# Altium PCB fan.PcbDoc
Units mil, origin at the board's own origin, x right, y up, seen from the top; angles counter-clockwise.
Board outline 6000 x 4000 mil, 2 copper layers (Top Layer, Bottom Layer); 27 components, 39 nets, 117 pads, 0 vias.
Unrouted connection lines stored in the file: 8.
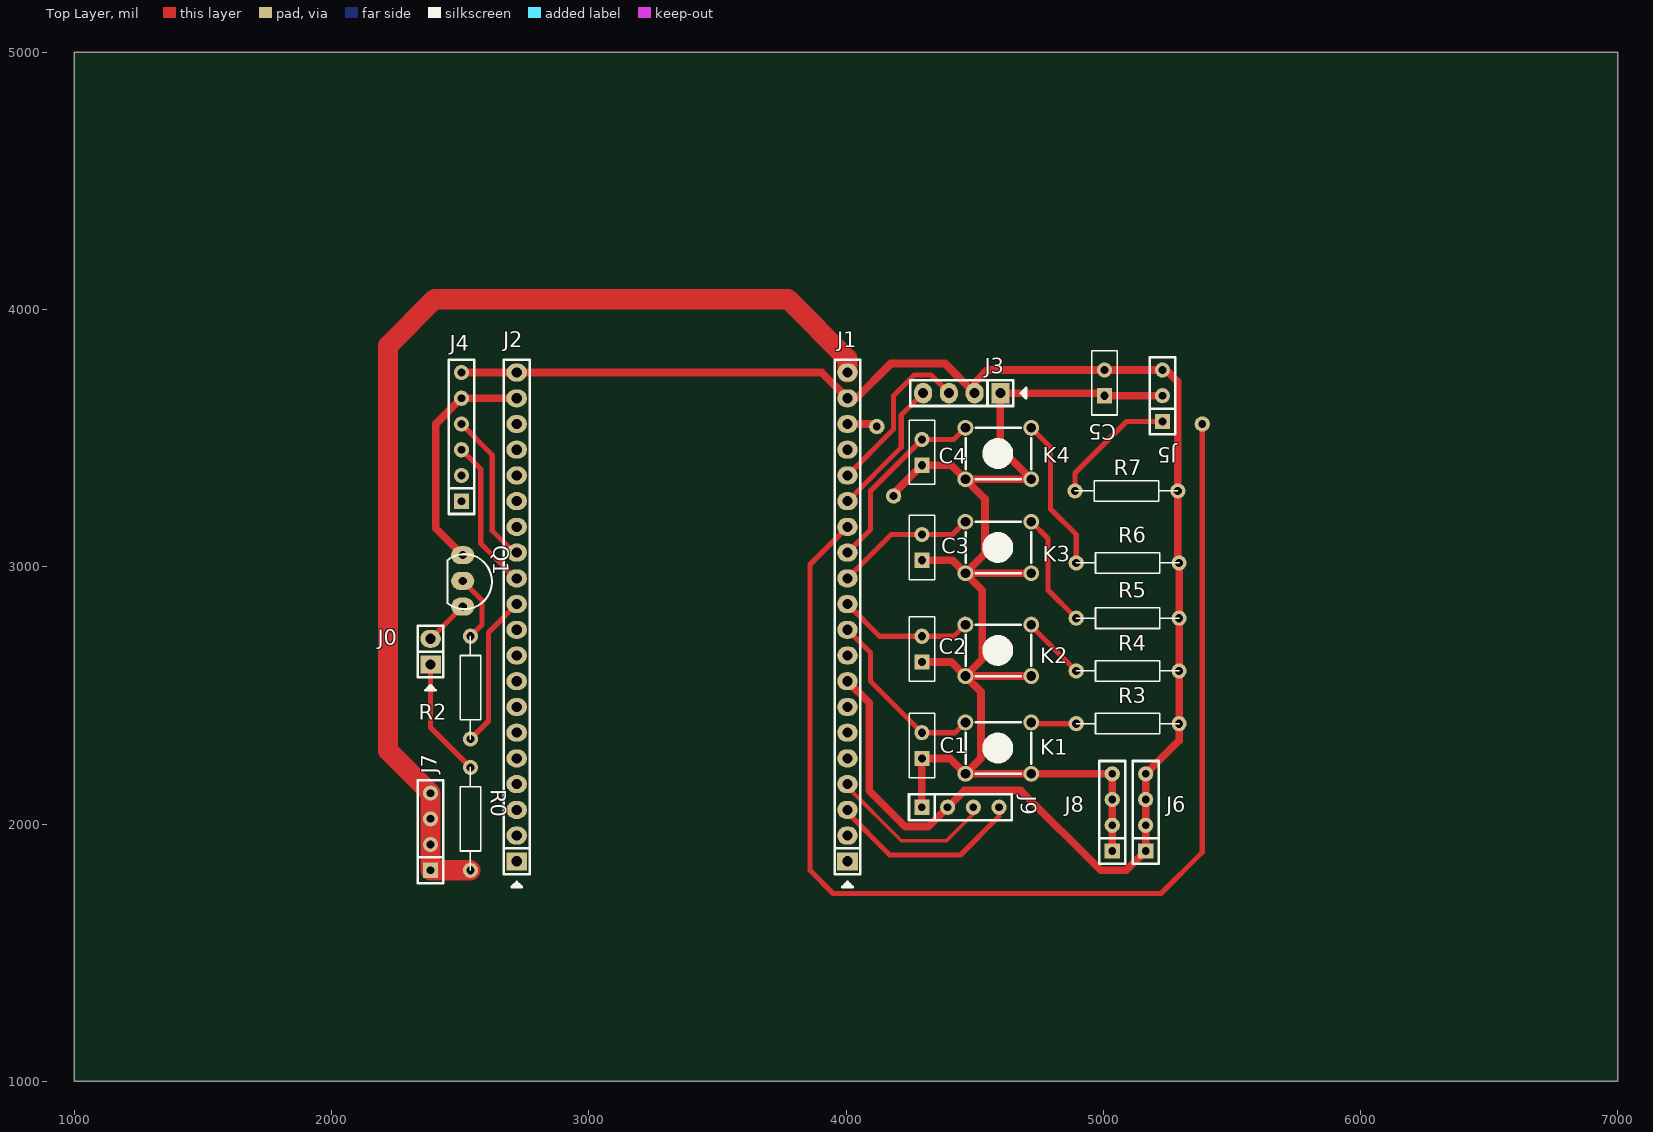
[diagram p0: Top Layer view]
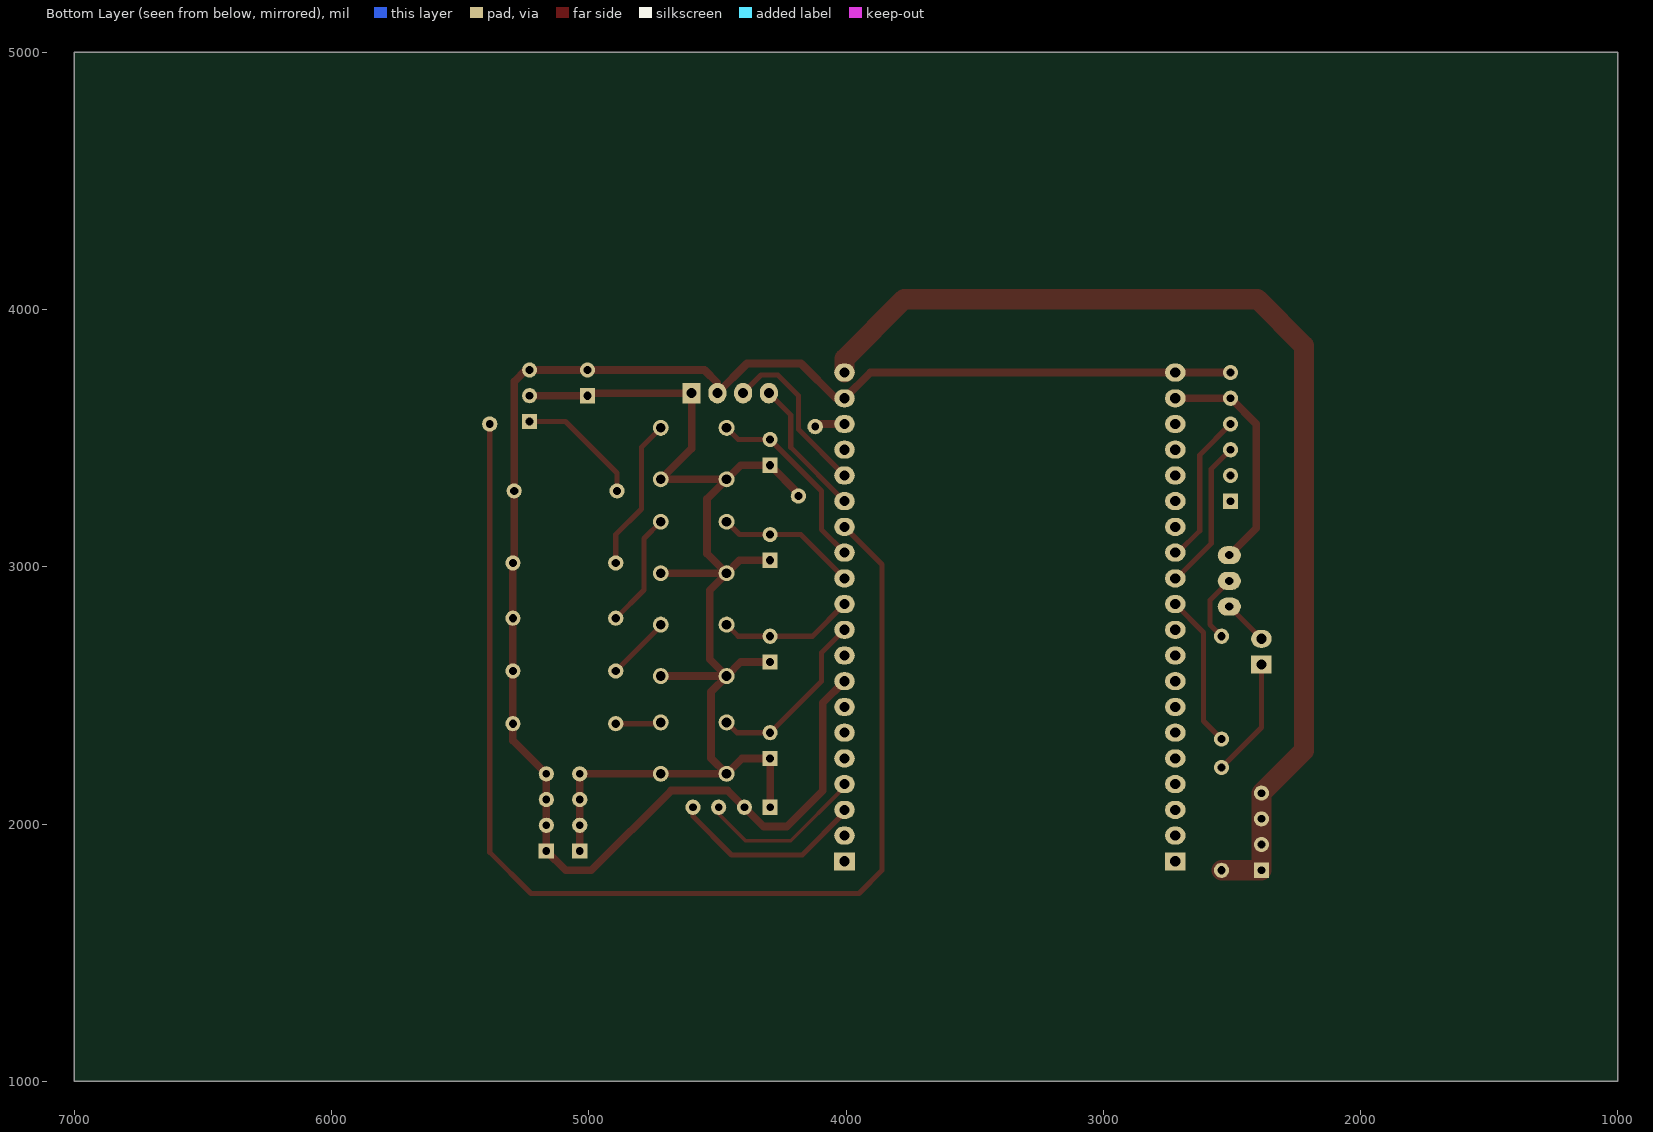
[diagram p1: Bottom Layer view, seen from below]

## Layer stack, top to bottom
Top Layer: signal copper 1.4
Dielectric: dielectric 12.6, FR-4, Dk 4.8
Bottom Layer: signal copper 1.4

## Board outline
1000,1000 7000,1000 7000,5000 1000,5000

## Design rules (kind name [scope] priority, off if disabled: settings)
Clearance [All] p1: gap=10
PolygonConnect [All] p1: connectstyle=Relief reliefconductorwidth=10 reliefentries=4 polygonreliefangle="90 Angle" airgapwidth=10
RoutingVias [All] p1: holewidth=28 width=50 viastyle="Through Hole" minholewidth=28 minwidth=50 maxholewidth=28 maxwidth=50
SolderMaskExpansion [All] p1: expansion=4
Width [All] p1: maxlimit=78.74 minlimit=10 preferedwidth=15
28 further rules are at their usual default settings.

## Components (designator, comment, footprint, x,y, rotation, side; value= is the part's Value field where it differs from the comment)
C1 "104" C-RAD254 4295,2255 r90 top
C2 "104" C-RAD254 4295,2630 r90 top
C3 "104" C-RAD254 4295,3025 r90 top
C4 "104" C-RAD254 4295,3395 r90 top
C5 "104" C-RAD254 5005,3665 r90 top
J0 "fan" PIN-2-2.54-1.0 2385,2670 r90 top
J1 "left" PIN-20-2.54-1.0 4005.71,2805 r90 top
J2 "right" PIN-20-2.54-1.0 2720,2805 r90 top
J3 "OLED" PIN-4-2.54-1.0 4450,3675 r180 top
J4 "ESP8266" SIP6 2505,3255 r90 top
J5 "REMOTE" SIP3 5230,3565 r90 top
J6 "HEADER4" SIP4 5165,1895 r90 top
J7 "V5" SIP4 2385,1820 r90 top
J8 "HEADER4" SIP4 5035,1895 r90 top
J9 "HEADER4" SIP4 4295,2065 r0 top
K1 "KEY-2P" KEY_M 4720,2195 r180 top
K2 "KEY-2P" KEY_M 4720,2575 r180 top
K3 "KEY-2P" KEY_M 4720,2975 r180 top
K4 "KEY-2P" KEY_M 4720,3340 r180 top
Q1 "SS8050" TO-92 2510,3045 r0 top
R0 "10R" R-AXIAL-0.4 2540,1820 r90 top
R2 "1K" R-AXIAL-0.4 2540,2730 r270 top
R3 "5K" R-AXIAL-0.4 5295,2390 r180 top
R4 "5K" R-AXIAL-0.4 5295,2595 r180 top
R5 "5K" R-AXIAL-0.4 5295,2800 r180 top
R6 "5K" R-AXIAL-0.4 5295,3015 r180 top
R7 "4.7K" R-AXIAL-0.4 4890,3295 r0 top

## Footprints (in the part's own frame and the unit in brackets; to place one, negate y for a bottom-side part, rotate by r counter-clockwise, add the part's x,y. Pads: shape width x height; smd on the part's side, far side on the other; paste and mask are expansions set on the pad)
C-RAD254 [mm]
  rect 1.5x1.5 hole 0.813: 1(0,0)
  round 1.5 hole 0.813: 2(2.54,0)
  silkscreen extent -1.91,-1.27 4.44,1.27
KEY_M [mil]
  round 62 hole 38: 1(0,0) 1(255.91,0) 2(0,-200) 2(255.91,-200)
  silkscreen extent 0,-200 255,0
PIN-2-2.54-1.0 [mil] "Pin Header"
  rect 70x80 hole 39.37: 1(-50,0)
  oval 70x80 hole 39.37: 2(50,0)
  silkscreen extent -150,-50 100,50, body extent -100,-50 100,50, height 398
PIN-4-2.54-1.0 [mil] "Pin Header"
  rect 70x80 hole 39.37: 1(-150,0)
  oval 70x80 hole 39.37: 2(-50,0) 3(50,0) 4(150,0)
  silkscreen extent -250,-50 200,50, body extent -200,-50 200,50, height 398
PIN-20-2.54-1.0 [mil] "Pin Header"
  rect 70x80 hole 39.37: 1(-950,0)
  oval 70x80 hole 39.37: 2(-850,0) 3(-750,0) 4(-650,0) 5(-550,0) 6(-450,0) 7(-350,0) 8(-250,0) 9(-150,0) 10(-50,0) 11(50,0) 12(150,0) 13(250,0) 14(350,0) 15(450,0) 16(550,0) 17(650,0) 18(750,0) 19(850,0) 20(950,0)
  silkscreen extent -1050,-50 1000,50, body extent -1000,-50 1000,50, height 398
R-AXIAL-0.4 [mm]
  round 1.5 hole 0.813: 1(0,0) 2(10.16,0)
  silkscreen extent 0,-1.02 10.16,1.02
SIP3 [mm]
  rect 1.5x1.5 hole 0.762: 1(0,0)
  round 1.5 hole 0.762: 2(2.54,0) 3(5.08,0)
  silkscreen extent -1.27,-1.27 6.35,1.27
SIP4 [mm]
  rect 1.5x1.5 hole 0.762: 1(0,0)
  round 1.5 hole 0.762: 2(2.54,0) 3(5.08,0) 4(7.62,0)
  silkscreen extent -1.27,-1.27 8.89,1.27
SIP6 [mm]
  rect 1.5x1.5 hole 0.762: 1(0,0)
  round 1.5 hole 0.762: 2(2.54,0) 3(5.08,0) 4(7.62,0) 5(10.16,0) 6(12.7,0)
  silkscreen extent -1.27,-1.27 13.97,1.27
TO-92 [mil]
  oval 90x70 hole 31.5: 1(0,-100) 2(0,0) 3(0,-200)
  silkscreen extent -60,-209 114,4

## Part data
C1 C2 C3 C4 C5: library part CAP
J0: library part HDR1x2, "Connector"
J1 J2: library part HDR1x20, "Connector"
J3: library part HDR1x4, "Connector"
J4: library part HEADER6
J5: library part HEADER3
J7: library part HEADER4
K1 K2 K3 K4: "Key"
Q1: library part 8050-SMD, "高频放大-NPN型"
R0 R2 R3 R4 R5 R6 R7: library part RES

## Free pads (board coordinates)
  round 60 hole 30: 0(4185,3275) 1(4120,3545) 2(5385,3555)

## Nets (pads, with @x,y where several pads share a name; then routed paths per layer and width w, separated by ;. In a path a pad name is that pad's centre, name@x,y a point inside that pad or via, vN(x,y) a via of type N, cw(c..) or ccw(c..) an arc to the next point about the centre after c; other vN are vias at no path point)
BTN: J2.16
CLK: J2.6
CSN: J2.9
EXTON: J1.5
GND: C1.1 C2.1 C3.1 C4.1 C5.1 J1.18 J2.18 J2.19 J3.1 J4.5 J5.2 J8.1 J8.2 J8.3 J8.4 J9.1 K1.1 K2.1 K3.1 K4.1 pad.0 pad.1 Q1.2 | length 6121.8
  Top Layer w30: Q1.2 2405,3150 2405,3555 J4.5 J2.19 ; J1.18 4110,3555 pad.1 ; pad.0 4185,3285 C4.1 4409.09,3395 K4.1@4464.09,3340 ; J9.1 C1.1 4404.09,2255 K1.1@4464.09,2195 ; C2.1 4409.09,2630 K2.1@4464.09,2575 ; C3.1 4414.09,3025 K3.1@4464.09,2975 ; K2.1@4720,2575 K2.1@4464.09,2575 ; K3.1@4720,2975 K3.1@4464.09,2975 ; J8.1 J8.2 J8.3 J8.4 4720,2195 K1.1@4464.09,2195 ; J5.2 C5.1 4995,3675 J3.1 4600,3460 4720,3340 K4.1@4464.09,3340 ; K1.1@4464.09,2195 4525,2255.91 4525,2514.09 K2.1@4464.09,2575 ; K2.1@4464.09,2575 4530,2640.91 4530,2909.09 K3.1@4464.09,2975 ; K3.1@4464.09,2975 4540,3050.91 4540,3264.09 K4.1@4464.09,3340
IO4: J2.4
IO5: J2.3
IO6: J2.2
IO7: J2.1
IRQ: J2.5
LED1: J2.14
LED2: J2.15
MISO: J2.7
MOSI: J2.8
NetJ0_1: J0.1 R0.2 | length 464.2
  Top Layer w20: J0.1 2385,2375 R0.2
NetJ0_2: J0.2 Q1.3 | length 176.8
  Top Layer w20: J0.2 Q1.3
NetQ1_1: Q1.1 R2.1 | length 264.7
  Top Layer w20: Q1.1 2585,2870 2585,2775 R2.1
PA3: J2.10
PA8: J1.2
PA15: J1.9
"PB1 TIM3-3": J2.11 R2.2 | length 599.6
  Top Layer w20: R2.2 2610,2400 2610,2745 J2.11
"PB3 PLAY": C1.2 J1.10 K1.2 R3.2 | length 882.6
  Top Layer w20: J1.10 4095,2665.71 4095,2555 C1.2 4424.09,2355 K1.2@4464.09,2395 ; K1.2@4720,2395 4725,2390 R3.2
"PB4 SET": C2.2 J1.11 K2.2 R4.2 | length 781.3
  Top Layer w20: J1.11 4130.71,2730 C2.2 4419.09,2730 K2.2@4464.09,2775 ; K2.2@4720,2775 4720,2770 R4.2
"PB5 VOL-": C3.2 J1.12 K3.2 R5.2 | length 997
  Top Layer w20: J1.12 4175.71,3125 C3.2 4414.09,3125 K3.2@4464.09,3175 ; K3.2@4720,3175 4785,3110 4785,2910 R5.2
"PB8 REMOTE IN": J1.14 J5.1 pad.2 R7.1 | length 5171.8
  Top Layer w20: J1.14 3860,3009.29 3860,1820 3950,1730 5225,1730 5385,1890 pad.2@5385,3545 ; R7.1 4890,3365 5090,3565 J5.1
"PB9 VOL+": C4.2 J1.13 K4.2 R6.2 | length 1345
  Top Layer w20: J1.13 4095,3144.29 4095,3295 C4.2 4419.09,3495 K4.2@4464.09,3540 ; K4.2@4720,3540 4795,3465 4795,3225 4895,3125 R6.2
"PB10 USART3 TX": J2.12 J4.3 | length 592
  Top Layer w20: J4.3 2580,3380 2580,3090 2715,2955 J2.12
"PB11 USART3 RX": J2.13 J4.4 | length 594.9
  Top Layer w20: J4.4 2625,3435 2625,3140 2710,3055 J2.13
PB15: J1.1
RESENT: J2.17
RST: J1.7
RX: J1.4 J9.3 | length 655.2
  Top Layer w15: J1.4 4005.71,2144.29 4215,1935 4390,1935 4495,2040 J9.3
SCL: J1.16 J3.3 | length 661.4
  Top Layer w20: J1.16 4185,3534.29 4185,3665 4265,3745 4330,3745 J3.3
SDA: J1.15 J3.4 | length 541.9
  Top Layer w20: J1.15 4215,3464.29 4215,3590 J3.4
TX: J1.3 J9.4 | length 765.2
  Top Layer w20: J1.3 4005.71,2044.29 4170,1880 4445,1880 4595,2030 J9.4
V3.3: C5.2 J1.8 J1.19 J2.20 J3.2 J4.6 J5.3 J6.1 J6.2 J6.3 J6.4 J9.2 R3.1 R4.1 R5.1 R6.1 R7.2 | length 6700.6
  Top Layer w30: J4.6 J2.20 3905.71,3755 J1.19 4040,3655 4175,3790 4385,3790 J3.2 4500,3715 4550,3765 C5.2 J5.3 5245,3765 5290,3720 R7.2 5290,3020 R6.1 R5.1 R4.1 R3.1 5295,2325 J6.4 J6.3 J6.2 J6.1 5090,1820 4990,1820 4680,2130 4460,2130 J9.2 4320,1990 4230,1990 4090,2130 4090,2470.71 J1.8
V5: J1.20 J7.1 J7.2 J7.3 J7.4 R0.1 | length 4273.5
  Top Layer w78.74: R0.1 J7.1 J7.2 J7.3 J7.4 2220,2285 2220,3860 2400,4040 3775,4040 4005.71,3809.29 J1.20
VBAT: J1.17
WAKEUP: J1.6
pads on no net: J4.1 J4.2